# EAGLE board M_3x4._v7 (EAGLE 9.6.2), part 1 of 2
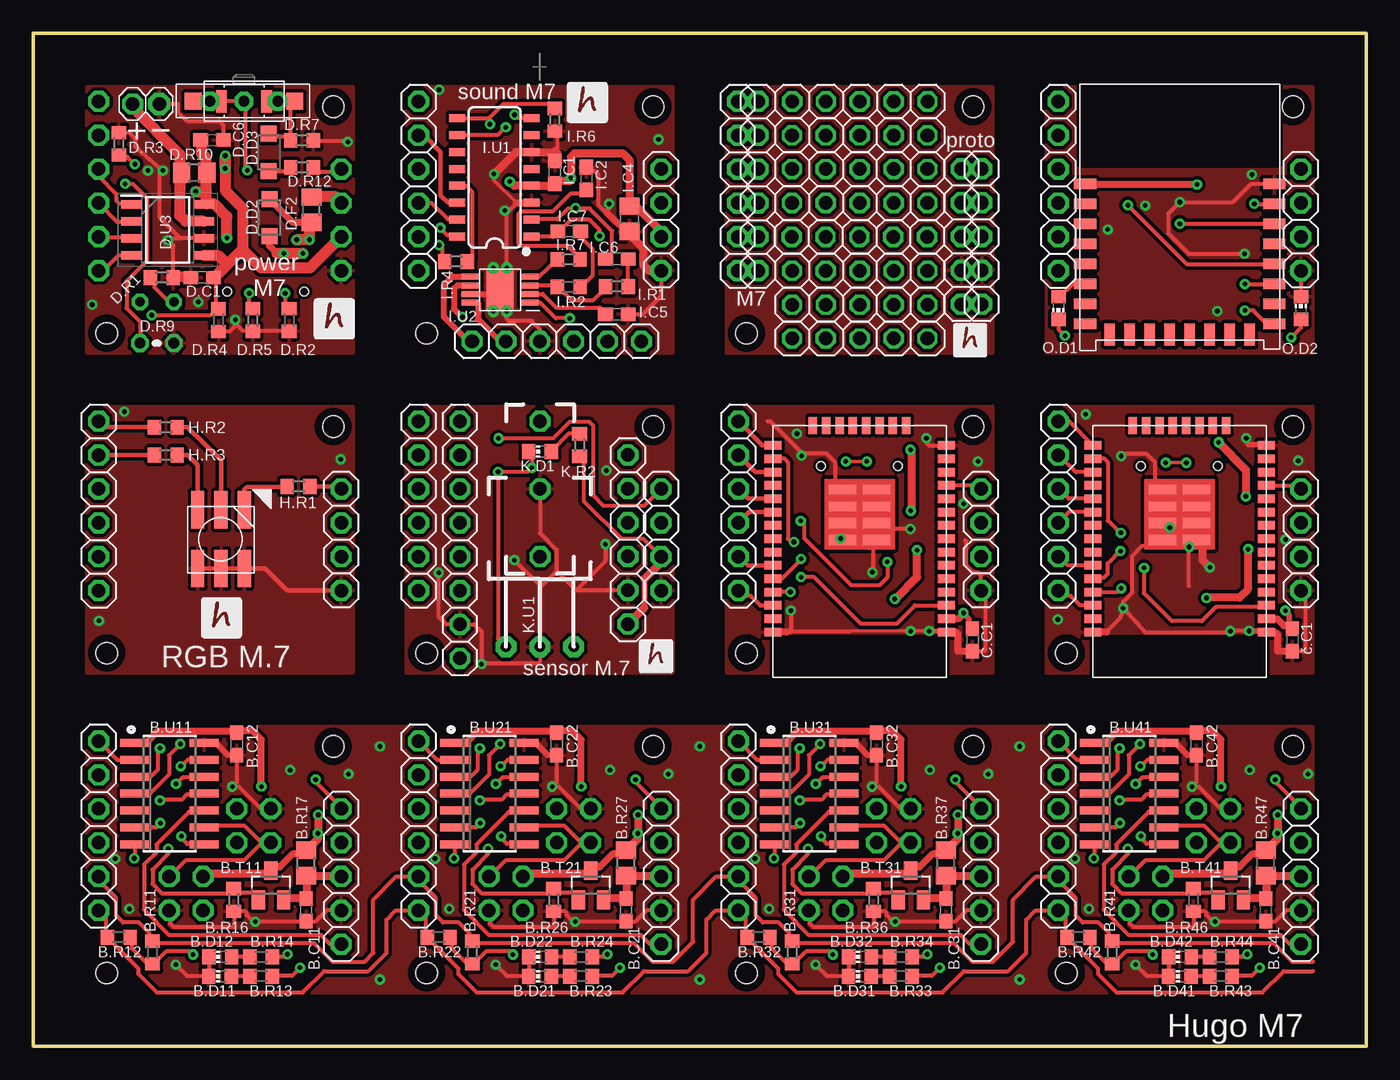
[diagram p0: board, top side]
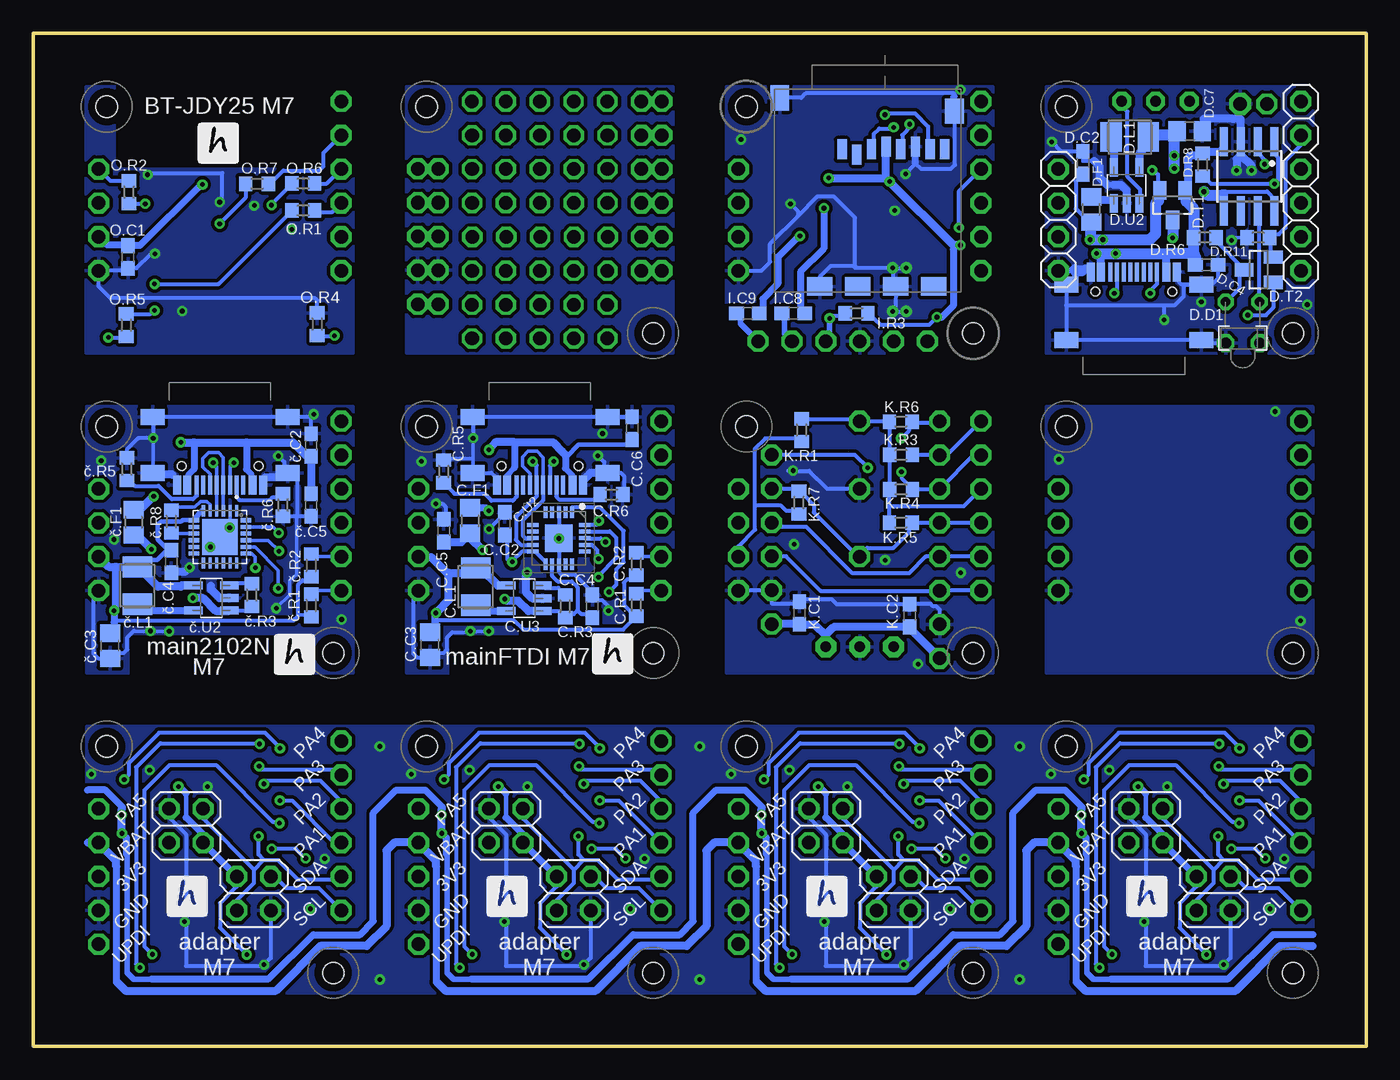
[diagram p1: board, bottom side, seen from below]

Size 100 x 76 mm. Coordinates in mm from the lower left corner, seen from the top.
Outline: 0,0 100,0 100,76 0,76 0,0
Copper layers (1*16): Top 0.035mm / dielectric 1.5mm / Bottom 0.035mm
Design rules "default *": minimum track width 10mil, minimum drill 0.35mm, track to track 6mil, track to pad 6mil, pad to pad 6mil, via to via 6mil, smd to smd 6mil, copper to edge 0mil, drill to drill 15mil, minimum pad ring 10mil, minimum via ring 8mil, stop-mask expansion 4mil, vias tented up to drill 14mil, thermal gap 10mil
Holes 1.6 mm at 5.5,29.5 22.5,46.5 29.5,53.5 46.5,70.5 70.5,70.5 53.5,53.5 94.5,70.5 5.5,5.5 22.5,22.5 29.5,5.5 46.5,22.5 53.5,5.5 70.5,22.5 77.5,5.5 94.5,22.5 46.5,46.5 29.5,29.5 53.5,29.5 70.5,46.5 77.5,29.5 94.5,46.5 5.5,53.5 22.5,70.5
tRestrict: area 21.5,45.5 to 23.5,47.5; area 4.5,28.5 to 6.5,30.5; area 45.5,69.5 to 47.5,71.5; area 28.5,52.5 to 30.5,54.5; area 69.5,69.5 to 71.5,71.5; area 52.5,52.5 to 54.5,54.5; area 93.5,69.5 to 95.5,71.5; area 21.5,21.5 to 23.5,23.5; area 4.5,4.5 to 6.5,6.5; area 45.5,21.5 to 47.5,23.5; area 28.5,4.5 to 30.5,6.5; area 69.5,21.5 to 71.5,23.5; 11 more areas
bRestrict: area 4.5,28.5 to 6.5,30.5; area 21.5,45.5 to 23.5,47.5; area 28.5,52.5 to 30.5,54.5; area 45.5,69.5 to 47.5,71.5; area 52.5,52.5 to 54.5,54.5; area 69.5,69.5 to 71.5,71.5; area 93.5,69.5 to 95.5,71.5; area 21.5,21.5 to 23.5,23.5; area 4.5,4.5 to 6.5,6.5; area 45.5,21.5 to 47.5,23.5; area 28.5,4.5 to 30.5,6.5; area 69.5,21.5 to 71.5,23.5; 11 more areas

## Footprints (pad centres in the part's own frame; a part is rotated, then mirrored left to right if it is on the bottom)
C0603 = smd 1.1 x 1: 1 -0.85,0; 2 0.85,0
CHIP-LED0603 = smd 1.1 x 1: A1 0,-0.85; C1 0,0.85
1X05 = drill 1.016 pad 1.575 octagon: 1 -5.08,0; 2 -2.54,0; 3 0,0; 4 2.54,0; 5 5.08,0
1X06 = drill 1.016 pad 1.575 octagon: 1 -6.35,0; 2 -3.81,0; 3 -1.27,0; 4 1.27,0; 5 3.81,0; 6 6.35,0
2X02 = drill 1.016 pad 1.575 octagon: 1 -1.27,-1.27; 2 -1.27,1.27; 3 1.27,-1.27; 4 1.27,1.27
R0603 = smd 1 x 1.1: 1 -0.85,0; 2 0.85,0
FUSE = smd 1.3 x 1.5: 1 -0.95,0; 2 0.95,0
SO23 = smd 1 x 1.4: D 0,1.1; G -0.95,-1.1; S 0.95,-1.1
SO14 = smd 0.6 x 2.2: 1 -3.81,-2.6; 2 -2.54,-2.6; 3 -1.27,-2.6; 4 0,-2.6; 5 1.27,-2.6; 6 2.54,-2.6; 7 3.81,-2.6; 8 3.81,2.6; 9 2.54,2.6; 10 1.27,2.6; 11 0,2.6; 12 -1.27,2.6; 13 -2.54,2.6; 14 -3.81,2.6
C0805 = smd 1.3 x 1.5: 1 -0.95,0; 2 0.95,0
R0805 = smd 1.3 x 1.5: 1 -0.95,0; 2 0.95,0
L3230M = smd 1.6 x 2.2: 1 -1.4,0; 2 1.4,0
TTGO-MICRO-32 = smd 1.27 x 0.635: 3V3 -6.5,5; EN -6.5,4; GND1 -6.5,6; GND2 -6.5,-8; GND3 6.5,6; IO0 6.5,-7; IO2 6.5,-8; IO4 6.5,-6; IO5 6.5,-3; IO12 -6.5,-7; IO14 -6.5,-6; IO16 6.5,-5; IO17 6.5,-4; IO18 6.5,-2; IO19 6.5,-1; IO21 6.5,1; IO22 6.5,4; IO23 6.5,5; IO25 -6.5,-3; IO26 -6.5,-4; IO27 -6.5,-5; IO32 -6.5,-1; IO33 -6.5,-2; IO34 -6.5,1; IO35 -6.5,0; NC 6.5,0; RXD0 6.5,2; TXD0 6.5,3; VN -6.5,2; VP -6.5,3 | smd 0.635 x 1.27: CLK 0.5,-9.5; CMD -0.5,-9.5; IO13 -3.5,-9.5; IO15 3.5,-9.5; SD0 1.5,-9.5; SD1 2.5,-9.5; SD2 -2.5,-9.5; SD3 -1.5,-9.5 | smd 2.032 x 0.762: GND4 -1.27,-0.889; GND5 1.27,-0.889; GND6 -1.27,-2.159; GND7 1.27,-2.159; GND8 -1.27,-3.429; GND9 -1.27,-4.699; GND10 1.27,-3.429; GND11 1.27,-4.699
QFN50P400X400X80-21N = smd 0.85 x 0.3: 1 -1.95,1; 2 -1.95,0.5; 3 -1.95,0; 4 -1.95,-0.5; 5 -1.95,-1; 11 1.95,-1; 12 1.95,-0.5; 13 1.95,0; 14 1.95,0.5; 15 1.95,1 | smd 0.3 x 0.85: 6 -1,-1.95; 7 -0.5,-1.95; 8 0,-1.95; 9 0.5,-1.95; 10 1,-1.95; 16 1,1.95; 17 0.5,1.95; 18 0,1.95; 19 -0.5,1.95; 20 -1,1.95 | smd 2.05 x 2.05: 21 0,0
SOT32-5 = smd 0.6 x 1.4: BP 0.95,1.35; GND 0,-1.35; SHDN 0.95,-1.35; VIN -0.95,-1.35; VOUT -0.95,1.35
LED_1.8 = drill 0.7 octagon: 1 -1.27,-0.4; 2 1.27,-0.4
SHOTKY_2.8 = smd 1.2 x 1.2: A -1.4,0; K 1.4,0
1X04 = drill 1.016 pad 1.575 octagon: 1 -3.81,0; 2 -1.27,0; 3 1.27,0; 4 3.81,0
1X02-2 = drill 1.016 pad 1.676 octagon: 1 -1,0 | drill 1.016 pad 1.575 octagon: 2 1,0
SWITCH = drill 0.8 pad 1.422 octagon: P$1 2.54,0; P$2 0,0; P$3 -2.54,0 | smd 0.8 x 1.7: P$4 -1.7,0; P$5 1.7,0 | smd 1.27 x 1.27: P$6 -3.81,0; P$7 3.81,0
THERM = drill 0.813 octagon: 1 -1.27,0; 2 1.27,0
SOIC127P600X175-8N = smd 1.528 x 0.65: 1 -2.711,1.905; 2 -2.711,0.635; 3 -2.711,-0.635; 4 -2.711,-1.905; 5 2.711,-1.905; 6 2.711,-0.635; 7 2.711,0.635; 8 2.711,1.905
RGB_WW-FCE50TC-Q1 = smd 1 x 2.8: 1 -1.778,-2.286; 2 -0.028,-2.286; 3 1.722,-2.286; 4 -1.778,2.114; 5 -0.028,2.114; 6 1.722,2.114
SO16 = smd 0.6 x 1.2: 1 -4.445,-2.8; 2 -3.175,-2.8; 3 -1.905,-2.8; 4 -0.635,-2.8; 5 0.635,-2.8; 6 1.905,-2.8; 7 3.175,-2.8; 8 4.445,-2.8; 9 4.445,2.8; 10 3.175,2.8; 11 1.905,2.8; 12 0.635,2.8; 13 -0.635,2.8; 14 -1.905,2.8; 15 -3.175,2.8; 16 -4.445,2.8
MSOP-POWERPAD-8 = smd 1.4 x 0.45: 1 -2.184,0.959; 2 -2.184,0.309; 3 -2.184,-0.341; 4 -2.184,-0.991; 5 2.216,-0.991; 6 2.216,-0.341; 7 2.216,0.309; 8 2.216,0.959 | smd 2 x 3: 9 0.016,-0.016 | drill 0.35: P$10 -0.484,-1.651; P$11 0.516,-1.651; P$12 0.516,1.619; P$13 -0.484,1.619
1X08 = drill 1.016 pad 1.575 octagon: 1 -8.89,0; 2 -6.35,0; 3 -3.81,0; 4 -1.27,0; 5 1.27,0; 6 3.81,0; 7 6.35,0; 8 8.89,0
IR_RECEIVER = drill 0.8 pad 1.575 octagon: GND 0,0; OUT -2.54,0; VCC 2.54,0
USB-C = smd 0.6 x 1.45: A1B12 -3.235,3.825; A4B9 -2.46,3.825; B1A12 3.215,3.825; B4A9 2.44,3.825 | smd 0.3 x 1.45: A5 -1.26,3.825; A6 -0.26,3.825; A7 0.24,3.825; A8 1.24,3.825; B5 1.74,3.825; B6 0.74,3.825; B7 -0.76,3.825; B8 -1.76,3.825 | smd 1.8 x 1.2: SH1 -5.08,2.91; SH2 -5.08,-1.27; SH3 5.06,-1.27; SH4 5.06,2.91 | hole 0.65: 2.88,2.38; -2.9,2.38
SOP8 = smd 0.6 x 2.2: 1 -1.905,-2.6; 2 -0.635,-2.6; 3 0.635,-2.6; 4 1.905,-2.6; 5 1.905,2.6; 6 0.635,2.6; 7 -0.635,2.6; 8 -1.905,2.6
MOCRO_SD = smd 0.7 x 1.5: 1 8.92,-10.7; 2 7.82,-10.3; 3 6.72,-10.7; 4 5.62,-10.9; 5 4.52,-10.7; 6 3.42,-10.9; 7 2.32,-10.7; 8 1.22,-10.7 | smd 1.9 x 1.4: G1 4.9,-0.4; G2 10.6,-0.4; S1 2.05,-0.4; S2 7.75,-0.4 | smd 1.4 x 1.9: G3 0.5,-13.55; G4 13.6,-14.55
1X5_AUTO = drill 1.016 octagon: 1 -5.08,0; 2 -2.54,0; 3 0,0; 4 2.54,0; 5 5.08,0
JDY-25 = smd 1.676 x 0.813: ALED 14.6,2; GND 14.6,12.5; INPUT1 0.4,2; INPUT3 0.4,3.5; INPUT5 0.4,6.5; NC1 0.4,11; NC2 0.4,9.5; NC3 0.4,8; OUT3 14.6,3.5; OUT4 14.6,8; PWRC 14.6,9.5; RST 14.6,11; RXD 14.6,6.5; STAT 0.4,5; TXD 14.6,5; VCC 0.4,12.5 | smd 0.813 x 1.676: INPUT2 3.75,1.2; INPUT4 6.75,1.2; NC4 2.25,1.2; NC5 9.75,1.2; NC6 11.25,1.2; OUT1 12.75,1.2; OUT2 5.25,1.2; OUT5 8.25,1.2
BUTTON-SWITCH = drill 1.016 pad 1.575 octagon: P$1 0,0; P$2 5.08,0; P$3 10.16,0
QFN50P400X400X80-25N = smd 0.81 x 0.26: 1 -1.955,1.25; 2 -1.955,0.75; 3 -1.955,0.25; 4 -1.955,-0.25; 5 -1.955,-0.75; 6 -1.955,-1.25; 13 1.955,-1.25; 14 1.955,-0.75; 15 1.955,-0.25; 16 1.955,0.25; 17 1.955,0.75; 18 1.955,1.25 | smd 0.26 x 0.81: 7 -1.25,-1.955; 8 -0.75,-1.955; 9 -0.25,-1.955; 10 0.25,-1.955; 11 0.75,-1.955; 12 1.25,-1.955; 19 1.25,1.955; 20 0.75,1.955; 21 0.25,1.955; 22 -0.25,1.955; 23 -0.75,1.955; 24 -1.25,1.955 | smd 2.68 x 2.68: 25 0,0

## Placement (x,y rotation side)
B.C11  100n  [C0603]  20.47,10.23 270 top
B.C12  100n  [C0603]  15.26,22.68 270 top
B.C21  100n  [C0603]  44.47,10.23 270 top
B.C22  100n  [C0603]  39.26,22.68 270 top
B.C31  100n  [C0603]  68.47,10.23 270 top
B.C32  100n  [C0603]  63.26,22.68 270 top
B.C41  100n  [C0603]  92.47,10.23 270 top
B.C42  100n  [C0603]  87.26,22.68 270 top
B.D11  [CHIP-LED0603]  14,5.25 90 top
B.D12  [CHIP-LED0603]  14.03,6.7 90 top
B.D21  [CHIP-LED0603]  38,5.25 90 top
B.D22  [CHIP-LED0603]  38.03,6.7 90 top
B.D31  [CHIP-LED0603]  62,5.25 90 top
B.D32  [CHIP-LED0603]  62.03,6.7 90 top
B.D41  [CHIP-LED0603]  86,5.25 90 top
B.D42  [CHIP-LED0603]  86.03,6.7 90 top
B.J1  [1X05]  23.1,12.73 270 top
B.J2  [1X06]  4.9,16.54 90 top
B.J3  [2X02]  11.46,11.46 270 bottom
B.J4  [2X02]  16.54,16.54 270 bottom
B.J5  [1X06]  28.9,16.54 90 top
B.J6  [2X02]  35.46,11.46 270 bottom
B.J7  [2X02]  40.54,16.54 270 bottom
B.J8  [1X05]  47.1,12.73 270 top
B.J9  [1X06]  52.9,16.54 90 top
B.J10  [2X02]  59.46,11.46 270 bottom
B.J11  [2X02]  64.54,16.54 270 bottom
B.J12  [1X05]  71.1,12.73 270 top
B.J13  [1X06]  76.9,16.54 90 top
B.J14  [2X02]  83.46,11.46 270 bottom
B.J15  [2X02]  88.54,16.54 270 bottom
B.J16  [1X05]  95.1,12.73 270 top
B.R11  2k2  [R0603]  8.94,7.03 270 top
B.R12  2k2  [R0603]  6.42,8.17 0 top
B.R13  1k  [R0603]  17.09,5.25 0 top
B.R14  1k  [R0603]  17.09,6.7 0 top
B.R16  100k  [R0603]  15.03,10.97 270 top
B.R17  alt fuse or 0R  [FUSE]  20.47,13.75 90 top
B.R21  2k2  [R0603]  32.94,7.03 270 top
B.R22  2k2  [R0603]  30.42,8.17 0 top
B.R23  1k  [R0603]  41.09,5.25 0 top
B.R24  1k  [R0603]  41.09,6.7 0 top
B.R26  100k  [R0603]  39.03,10.97 270 top
B.R27  alt fuse or 0R  [FUSE]  44.47,13.75 90 top
B.R31  2k2  [R0603]  56.94,7.03 270 top
B.R32  2k2  [R0603]  54.42,8.17 0 top
B.R33  1k  [R0603]  65.09,5.25 0 top
B.R34  1k  [R0603]  65.09,6.7 0 top
B.R36  100k  [R0603]  63.03,10.97 270 top
B.R37  alt fuse or 0R  [FUSE]  68.47,13.75 90 top
B.R41  2k2  [R0603]  80.94,7.03 270 top
B.R42  2k2  [R0603]  78.42,8.17 0 top
B.R43  1k  [R0603]  89.09,5.25 0 top
B.R44  1k  [R0603]  89.09,6.7 0 top
B.R46  100k  [R0603]  87.03,10.97 270 top
B.R47  alt fuse or 0R  [FUSE]  92.47,13.75 90 top
B.T11  NX3008  [SO23]  17.83,12.09 0 top
B.T21  NX3008  [SO23]  41.83,12.09 0 top
B.T31  NX3008  [SO23]  65.83,12.09 0 top
B.T41  NX3008  [SO23]  89.83,12.09 0 top
B.U11  AT414  [SO14]  10.22,18.95 270 top
B.U21  AT414  [SO14]  34.22,18.95 270 top
B.U31  AT414  [SO14]  58.22,18.95 270 top
B.U41  AT414  [SO14]  82.22,18.95 270 top
C.C1  100n  [C0603]  70.46,30.48 270 top
C.C2  100n  [C0603]  64.63,39.21 90 bottom
C.C3  22u  [C0805]  70.25,30.12 270 bottom
C.C4  100n  [C0603]  58.05,33.01 90 bottom
C.C5  4u7  [C0603]  69.2,38.68 270 bottom
C.C6  10nF  [C0603]  55.08,46.37 270 bottom
C.F1  0.5A  [R0805]  67.22,39.44 270 bottom
C.J1  [1X06]  76.9,40.54 90 top
C.J2  [1X06]  52.9,40.54 90 top
C.L1  4u7  [L3230M]  66.81,34.49 90 bottom
C.R1  2k2  [R0603]  54.75,33.11 270 bottom
C.R2  2k2  [R0603]  54.75,36.18 270 bottom
C.R3  100k  [R0603]  60.09,33.01 270 bottom
C.R5  5K1  [R0603]  69.21,43.13 270 bottom
C.R6  5k1  [R0603]  56.63,41.39 180 bottom
C.U1  TTGO-MICRO-32  [TTGO-MICRO-32]  61.99,37.08 180 top
C.U2  FT231XQ-R  [QFN50P400X400X80-21N]  60.57,38.12 270 bottom
C.U3  MCP1603T-330I  [SOT32-5]  63.16,33.61 90 bottom
C.U4  TTGO-MICRO-32  [TTGO-MICRO-32]  85.99,37.08 180 top
D.C1  100n  [C0603]  12.67,57.67 0 top
D.C2  4u7  [C0603]  21.25,66.28 270 bottom
D.C4  4u7  [C0603]  11.97,58.63 180 bottom
D.C6  4u7  [C0603]  13.41,67.99 180 top
D.C7  10u  [C0805]  13.24,68.65 180 bottom
D.D1  LED_1.8  [LED_1.8]  9.27,55.45 180 bottom
D.D2  SHOTKY_2.8  [SHOTKY_2.8]  17.72,62.17 90 top
D.D3  SHOTKY_2.8  [SHOTKY_2.8]  17.67,67.07 90 top
D.F1  0.5A  [R0805]  20.63,62.79 90 bottom
D.F2  1.1A  [R0805]  20.86,62.76 90 top
D.J2  [1X06]  4.9,64.54 90 bottom
D.J3  [1X04]  23.1,62 270 bottom
D.L1  2u2  [L3230M]  17.75,68.21 0 bottom
D.LIPOL  [1X02-2]  8.45,70.7 180 top
D.ON/OFF/RESET  SWITCH  [SWITCH]  15.8,70.9 0 top
D.R1  5k1  [R0603]  9.65,57.67 180 top
D.R2  5k1  [R0603]  19.2,54.5 270 top
D.R3  I=1800/R (10k for 0.2A, 3k3 for 0.55A, 3k9 for 0.46A)  [R0603]  6.41,67.7 270 top
D.R4  390k  [R0603]  13.89,54.47 270 top
D.R5  5k1  [R0603]  16.46,54.5 270 top
D.R6  3k3  [R0603]  12.11,60.67 180 bottom
D.R7  390k  [R0603]  20.16,67.96 0 top
D.R8  10k?  [R0603]  12.26,66.13 90 bottom
D.R9  TERM_10K  [THERM]  9.27,52.75 180 top
D.R10  0.1  [R0805]  12.08,65.53 180 top
D.R11  390k  [R0603]  8.1,60.67 180 bottom
D.R12  100k  [R0603]  20.16,65.93 180 top
D.T1  FDV304  [SO23]  14.53,63.11 180 bottom
D.T2  NX3008  [SO23]  8.07,58.26 90 bottom
D.U2  LM3671_3.3  [SOT32-5]  17.97,64.6 0 bottom
D.U3  INA219AIDR  [SOIC127P600X175-8N]  10.08,61.25 0 top
G.J1  [1X06]  76.9,64.54 90 top
G.J2  [1X04]  95.1,62 270 top
H.D1  RGB_WW-FCE50TC-Q1  [RGB_WW-FCE50TC-Q1]  14.05,37.95 180 top
H.J2  [1X06]  4.9,40.54 90 top
H.J4  [1X06]  39.27,52.9 180 top
H.R1  82  [R0603]  19.9,42 180 top
H.R2  82  [R0603]  9.94,46.45 0 top
H.R3  82  [R0603]  9.94,44.36 0 top
I.C1  100n  [C0603]  39.13,65.56 90 top
I.C2  100n  [C0603]  41.5,65.11 270 top
I.C4  10u (22u)  [C0805]  44.73,62.08 90 top
I.C5  220n  [C0603]  43.78,54.92 180 top
I.C6  100n  [C0603]  43.78,59.06 0 top
I.C7  100n  [C0603]  40.2,61.15 0 top
I.C8  100n  [C0603]  42.98,55 180 bottom
I.C9  100n  [C0603]  46.4,55 180 bottom
I.J1  [1X04]  47.1,38 270 top
I.J2  [1X06]  28.9,64.54 90 top
I.J3  [1X04]  47.1,62 270 top
I.R1  10k  [R0603]  43.78,57 180 top
I.R2  10k  [R0603]  40.17,56.97 180 top
I.R3  10k  [R0603]  38.23,55 0 bottom
I.R4  10k  [R0603]  31.71,58.87 0 top
I.R6  1k5  [R0603]  39.13,69.5 90 top
I.R7  10k  [R0603]  40.17,59.05 180 top
I.U1  WT2003S  [SO16]  34.6,65.19 90 top
I.U2  TPA6211  [MSOP-POWERPAD-8]  35.03,56.74 180 top
JP1  [1X04]  71.1,38 270 top
JP2  [1X04]  95.1,38 270 top
JP3  [1X04]  23.1,38 270 top
JP4  [1X06]  52.85,64.54 90 top
JP5  [1X06]  54.37,64.54 90 top
JP6  [1X05]  69.63,60.76 270 top
JP7  [1X06]  28.9,40.54 90 top
JP8  [1X08]  32,38 90 top
JP9  [1X06]  44.61,38.02 90 top
JP11  [1X05]  71.15,60.76 270 top
K.C1  [C0603]  42.51,32.5 90 bottom
K.C2  [C0603]  34.26,32.3 90 bottom
K.D1  [CHIP-LED0603]  38,44.62 90 top
K.R1  100K  [R0603]  42.36,46.22 90 bottom
K.R2  180R  [R0603]  40.98,45.1 90 top
K.R3  0R  [R0603]  34.9,44.37 0 bottom
K.R4  0R  [R0603]  34.9,41.77 0 bottom
K.R5  0R  [R0603]  34.92,39.29 0 bottom
K.R6  0R  [R0603]  34.92,46.85 0 bottom
K.R7  100K  [R0603]  42.56,40.78 90 bottom
K.U1  VS1838B  [IR_RECEIVER]  38,29.96 0 top
O.C1  100n  [C0603]  92.9,59.22 90 bottom
O.D1  [CHIP-LED0603]  76.92,55.4 180 top
O.D2  [CHIP-LED0603]  95.1,55.4 0 top
O.R1  2k2  [R0603]  79.75,64.73 0 bottom
O.R2  2k2  [R0603]  92.82,64.07 270 bottom
O.R4  2k2  [R0603]  78.7,54.17 270 bottom
O.R5  2k2  [R0603]  93.03,54.09 90 bottom
O.R6  2k2  [R0603]  79.75,62.7 0 bottom
O.R7  2k2  [R0603]  83.22,64.71 0 bottom
U$1  USB-C  [USB-C]  62,45.93 180 bottom
U$2  USB-C  [USB-C]  86,45.93 180 bottom
U$3  USB-C  [USB-C]  17.43,54.25 0 bottom
U$4  CN3083  [SOP8]  8.78,65.27 180 bottom
U$5  MICRO_SD  [MOCRO_SD]  30.4,56.6 180 bottom
U$6  PINHD-1X5_AUTO  [1X5_AUTO]  62.01,70.89 0 top
U$7  PINHD-1X5_AUTO  [1X5_AUTO]  62,68.35 0 top
U$8  PINHD-1X5_AUTO  [1X5_AUTO]  62,65.81 0 top
U$9  PINHD-1X5_AUTO  [1X5_AUTO]  62,63.27 0 top
U$10  PINHD-1X5_AUTO  [1X5_AUTO]  61.97,60.73 0 top
U$11  PINHD-1X5_AUTO  [1X5_AUTO]  62,58.19 0 top
U$12  PINHD-1X5_AUTO  [1X5_AUTO]  62,55.64 0 top
U$13  PINHD-1X5_AUTO  [1X5_AUTO]  62,53.1 0 top
U$14  JDY-25  [JDY-25]  78.5,52.2 0 top
U$15  BUTTON-SWITCH  [BUTTON-SWITCH]  38.02,36.73 90 top
č.C1  100n  [C0603]  94.46,30.48 270 top
č.C2  100n  [C0603]  79.15,45.1 90 bottom
č.C3  22u  [C0805]  94.25,30.05 270 bottom
č.C4  100n  [C0603]  89.65,36.36 270 bottom
č.C5  4u7  [C0603]  79.15,40.61 90 bottom
č.F1  0.5A  [R0805]  92.47,39.31 270 bottom
č.L1  4u7  [L3230M]  92.18,34.56 90 bottom
č.R1  2k2  [R0603]  79.15,33.06 270 bottom
č.R2  2k2  [R0603]  79.15,36.08 270 bottom
č.R3  100k  [R0603]  83.61,33.85 270 bottom
č.R5  5K1  [R0603]  92.99,43.3 270 bottom
č.R6  5k1  [R0603]  81.27,40.61 90 bottom
č.R8  100k  [R0603]  89.64,39.36 90 bottom
č.U1  CP2102N  [QFN50P400X400X80-25N]  85.99,38.21 270 bottom
č.U2  MCP1603T-330I  [SOT32-5]  86.65,33.63 90 bottom

## Library data of the parts
B.C11 B.C12 B.C21 B.C22 B.C31 B.C32 B.C41 B.C42 C.C1-C.C6 D.C1 D.C2 D.C4 D.C6 D.C7 I.C1 I.C2 I.C4-I.C9 K.C1 K.C2 O.C1 č.C1-č.C5 = rcl; SPICEPREFIX: C
B.D11 B.D12 B.D21 B.D22 B.D31 B.D32 B.D41 B.D42 K.D1 O.D1 O.D2 = led
B.J1-B.J16 C.J1 C.J2 D.J2 D.J3 D.LIPOL G.J1 G.J2 H.J2 H.J4 I.J1-I.J3 JP1-JP9 JP11 U$6-U$13 = pinhead2
B.R11-B.R14 B.R16 B.R21-B.R24 B.R26 B.R31-B.R34 B.R36 B.R41-B.R44 B.R46 C.F1 C.R1-C.R3 C.R5 C.R6 D.F1 D.F2 D.R1-D.R8 D.R10-D.R12 I.R1-I.R4 I.R6 I.R7 K.R1-K.R7 O.R1 O.R2 O.R4-O.R7 č.F1 č.R1-č.R3 č.R5 č.R6 č.R8 = rcl; SPICEPREFIX: R
B.R17 B.R27 B.R37 B.R47 B.T11 B.T21 B.T31 B.T41 C.U1 C.U4 D.D1-D.D3 D.ON/OFF/RESET D.R9 D.T1 D.T2 H.D1 I.U2 K.U1 U$1-U$5 U$14 U$15 = hugo
B.U11 B.U21 B.U31 B.U41 = atmel
C.L1 D.L1 č.L1 = rcl; SPICEPREFIX: L
C.U2 = FT231XQ-R; DESCRIPTION: FTDI Chip FT231XQ-R, USB Transceiver; HEIGHT: 0.8mm; MANUFACTURER_NAME: FTDI Chip; MANUFACTURER_PART_NUMBER: FT231XQ-R
C.U3 D.U2 č.U2 = !stavebnice03
D.U3 = SamacSys_Parts; DESCRIPTION: 26-V, Bidirectional, Zero-Drift, High-Side, I2C Out Current/Power Monitor; HEIGHT: 1.75mm; MANUFACTURER_NAME: Texas Instruments; MANUFACTURER_PART_NUMBER: INA219AIDR; MOUSER_PART_NUMBER: 595-INA219AIDR; MOUSER_PRICE-STOCK: https://www.mouser.co.uk/ProductDetail/Texas-Instruments/INA219AIDR?qs=XGzIaZb%2FFYIE5YcOHTnKDA%3D%3D
H.R1-H.R3 = resistor
I.U1 = WT2003S
č.U1 = CP2104; AVAILABILITY: Unavailable; DESCRIPTION: USB Bridge, USB to UART USB 2.0 UART Interface 24-QFN (4x4); MF: Silicon Labs; MP: CP2104; PACKAGE: QFN-24 Silicon Labs; PRICE: None

## Nets
GND: B.C11.2 B.C12.2 B.C21.2 B.C22.2 B.C31.2 B.C32.2 B.C41.2 B.C42.2 B.D11.C1 B.D12.C1 B.D21.C1 B.D22.C1 B.D31.C1 B.D32.C1 B.D41.C1 B.D42.C1 B.J1.4 B.J3.4 B.J4.1 B.J6.4 B.J7.1 B.J8.4 B.J10.4 B.J11.1 B.J12.4 B.J14.4 B.J15.1 B.J16.4 B.R16.2 B.R26.2 B.R36.2 B.R46.2 B.U11.14 B.U21.14 B.U31.14 B.U41.14
GND1: C.C1.2 C.C2.2 C.C3.2 C.C4.2 C.C5.1 C.C6.1 C.R5.1 C.R6.1 C.U1.GND1 C.U1.GND2 C.U1.GND3 C.U1.GND4 C.U1.GND5 C.U1.GND6 C.U1.GND7 C.U1.GND8 C.U1.GND9 C.U1.GND10 C.U1.GND11 C.U2.3 C.U2.13 C.U2.21 C.U3.GND JP1.4 U$1.A1B12 U$1.B1A12 U$1.SH1 U$1.SH2 U$1.SH3 U$1.SH4
GND2: C.U4.GND1 C.U4.GND2 C.U4.GND3 C.U4.GND4 C.U4.GND5 C.U4.GND6 C.U4.GND7 C.U4.GND8 C.U4.GND9 C.U4.GND10 C.U4.GND11 JP2.4 U$2.A1B12 U$2.B1A12 U$2.SH1 U$2.SH2 U$2.SH3 U$2.SH4 č.C1.2 č.C2.2 č.C3.2 č.C4.2 č.C5.1 č.R5.1 č.R6.1 č.U1.2 č.U1.25 č.U2.GND
GND3: D.C1.1 D.C2.1 D.C4.1 D.C6.1 D.C7.1 D.J3.4 D.LIPOL.1 D.R1.1 D.R2.2 D.R3.1 D.R4.2 D.R5.2 D.R7.2 D.R9.1 D.R11.2 D.U2.GND D.U3.6 U$3.A1B12 U$3.B1A12 U$3.SH1 U$3.SH2 U$3.SH3 U$3.SH4 U$4.3
GND4: H.D1.4 H.D1.5 H.D1.6 JP3.4
GND5: H.J4.4 I.C1.2 I.C2.1 I.C4.1 I.C5.1 I.J3.4 I.R6.1 I.U1.3 I.U1.6 I.U2.7 I.U2.9 I.U2.P$10 I.U2.P$11 I.U2.P$12 I.U2.P$13 U$5.6 U$5.G1 U$5.G2 U$5.G3 U$5.G4
GND6: JP6.4 JP11.4
GND7: G.J2.4 O.C1.1 O.D2.C1 O.R4.1 U$14.GND
GND8: I.J1.4 JP8.2 JP9.2 K.C1.2 K.C2.2 K.U1.GND U$15.P$2
IN+: D.LIPOL.2 D.R10.2 D.U3.7
IN-: D.C6.2 D.R10.1 D.T1.D D.U3.8 U$4.5 U$4.8
N$1: B.C21.1 B.J8.3 B.R27.1 B.T21.S
N$2: B.D22.A1 B.R24.1
N$3: B.D12.A1 B.R14.1
N$4: B.C11.1 B.J1.3 B.R17.1 B.T11.S
N$5: B.R13.2 B.U11.4
N$6: B.R23.2 B.U21.4
N$7: B.C31.1 B.J12.3 B.R37.1 B.T31.S
N$8: B.D32.A1 B.R34.1
N$9: B.R33.2 B.U31.4
N$10: B.C41.1 B.J16.3 B.R47.1 B.T41.S
N$11: B.D42.A1 B.R44.1
N$12: B.R43.2 B.U41.4
N$13: C.U2.9 U$1.A7 U$1.B7
N$14: C.U2.8 U$1.A6 U$1.B6
N$15: C.R6.2 U$1.A5
N$16: C.R5.2 U$1.B5
N$17: C.L1.1 C.U3.VOUT
N$18: C.R3.1 C.U3.SHDN
N$19: C.C2.1 C.U2.10 C.U2.11 C.U2.20
N$20: C.C6.2 C.F1.1 U$1.A4B9 U$1.B4A9
N$21: U$2.A7 U$2.B7 č.U1.4
N$22: U$2.A6 U$2.B6 č.U1.3
N$24: U$2.A5 č.R6.2
N$25: U$2.B5 č.R5.2
N$27: č.R8.2 č.U1.5
N$28: č.L1.1 č.U2.VOUT
N$29: č.R3.1 č.U2.SHDN
N$30: C.J1.5 C.U4.IO4
N$31: C.J1.4 C.U4.IO17
N$32: C.J1.3 C.U4.IO5
N$33: C.J1.6 C.U4.IO2
N$34: C.U4.IO27 JP2.1
N$35: č.R8.1 č.U1.9
N$36: č.F1.2 č.R3.2 č.U2.VIN
N$37: D.L1.1 D.U2.VOUT
N$38: D.R5.1 U$3.B5
N$39: D.R2.1 U$3.A5
N$40: D.R3.2 U$4.2
N$41: D.D1.1 U$4.7
N$42: D.R8.1 D.R9.2 U$4.1
N$43: D.F1.2 D.U2.VIN
N$44: D.D3.K D.ON/OFF/RESET.P$1 D.ON/OFF/RESET.P$5 D.ON/OFF/RESET.P$7 D.R7.1 D.U2.SHDN
N$45: D.D3.A D.R12.2
N$46: H.D1.2 H.R2.2
N$47: H.D1.1 H.R1.2
N$48: H.D1.3 H.R3.2
N$49: H.R1.1 JP3.1
N$50: H.J2.6 H.R2.1
N$51: H.J2.5 H.R3.1
N$52: I.C6.1 I.C8.1 I.U1.2
N$53: I.C7.1 I.C9.1 I.U1.1
N$54: I.C5.2 I.U2.2
N$55: I.R1.2 I.R2.2 I.U2.3
N$56: I.C6.2 I.R1.1
N$57: I.C7.2 I.R2.1
N$58: I.C2.2 I.R7.1
N$59: I.R7.2 I.U2.4
N$60: I.R4.2 I.U1.13
N$61: I.J2.5 I.U1.14
N$62: JP4.5 JP5.5
N$63: JP4.4 JP5.4
N$64: JP4.3 JP5.3
N$65: JP4.2 JP5.2
N$66: JP4.1 JP5.1
N$67: JP6.5 JP11.5
N$68: JP6.2 JP11.2
N$69: JP6.1 JP11.1
N$70: JP6.3 JP11.3
N$71: JP4.6 JP5.6
N$72: G.J2.1 O.R2.1
N$73: O.R1.1 U$14.RXD
N$74: O.R6.1 U$14.TXD
N$75: G.J1.5 O.R7.2
N$76: O.R7.1 U$14.PWRC
N$77: O.D2.A1 O.R5.1
N$78: O.R5.2 U$14.ALED
N$79: O.D1.A1 U$14.STAT
N$80: O.D1.C1 O.R4.2
N$81: O.R2.2 U$14.RST
N$82: JP7.2 JP8.4 JP9.4
N$83: JP7.1 JP8.3 JP9.3
N$84: K.D1.A1 K.R2.2
N$85: JP7.6 JP8.7 K.R3.2
N$86: I.J1.1 JP8.8 K.R6.2
N$87: JP7.5 JP8.6 JP9.6 K.D1.C1 K.R4.2 K.U1.OUT
N$88: JP7.4 K.R1.2 K.R3.1 K.R4.1 K.R5.1 K.R6.1 U$15.P$3
N$89: JP7.3 JP8.5 JP9.5 K.R5.2 K.R7.2 U$15.P$1
PA1: B.J2.3 B.U11.11
PA2: B.J2.4 B.U11.12
PA3: B.J2.5 B.U11.13
PA3-1: D.J2.5 D.R11.1 D.T2.S
PA4: B.J2.6 B.U11.2
PA5: B.J1.1 B.U11.3
PA5-1: D.J3.1 D.R12.1
PA6: B.J5.5 B.U21.13
PA7: B.J5.4 B.U21.12
PA8: B.D21.A1 B.R23.1
PA9: B.J5.6 B.U21.2
PA10: B.J5.3 B.U21.11
PA11: B.J8.1 B.U21.3
PA12: B.J9.5 B.U31.13
PA13: B.J9.4 B.U31.12
PA14: B.D31.A1 B.R33.1
PA15: B.J9.6 B.U31.2
PA16: B.J9.3 B.U31.11
PA17: B.J12.1 B.U31.3
PA18: B.J13.5 B.U41.13
PA19: B.J13.4 B.U41.12
PA20: B.D41.A1 B.R43.1
PA21: B.J13.6 B.U41.2
PA22: B.J13.3 B.U41.11
PA23: B.J16.1 B.U41.3
PA24: C.J2.5 C.U1.IO4
PA25: C.J2.4 C.U1.IO17
PA26: C.J2.3 C.U1.IO5
PA27: C.J2.6 C.U1.IO2
PA28: C.U1.IO27 JP1.1
PA29: D.C4.2 D.D2.A D.R6.2 D.R8.2 D.T1.G U$3.A4B9 U$3.B4A9 U$4.4
PA30: D.J2.4 D.U3.1
PA31: D.J2.3 D.U3.2
PA32: D.D1.2 D.R1.2 D.R6.1 D.T2.D
PA51: B.D11.A1 B.R13.1
PB1: B.R26.1 B.T21.G B.U21.7
PB2: B.R16.1 B.T11.G B.U11.7
PB3: B.R14.2 B.U11.6
PB4: B.R24.2 B.U21.6
PB5: B.R36.1 B.T31.G B.U31.7
PB6: B.R34.2 B.U31.6
PB7: B.R46.1 B.T41.G B.U41.7
PB8: B.R44.2 B.U41.6
PROG: C.U1.IO0 C.U2.18
PROG1: C.U4.IO0 č.U1.23
RESET: C.U1.EN C.U2.19
RESET1: C.U4.EN č.U1.19
RX: C.U4.TXD0 č.U1.20
RX1: I.J2.3 I.U1.15
RX2: G.J1.3 O.R6.2
RX/TX: C.U1.TXD0 C.U2.1
SCL: B.J2.1 B.J3.2 B.J4.3 B.J5.1 B.J6.2 B.J7.3 B.J9.1 B.J10.2 B.J11.3 B.J13.1 B.J14.2 B.J15.3 B.R12.1 B.R22.1 B.R32.1 B.R42.1 B.U11.9 B.U21.9 B.U31.9 B.U41.9
SCL1: C.J2.1 C.R1.1 C.U1.IO22
SCL2: C.J1.1 C.U4.IO22 č.R1.1
SCL3: D.J2.1 D.U3.4
SDA: B.J2.2 B.J3.3 B.J4.2 B.J5.2 B.J6.3 B.J7.2 B.J9.2 B.J10.3 B.J11.2 B.J13.2 B.J14.3 B.J15.2 B.R11.1 B.R21.1 B.R31.1 B.R41.1 B.U11.8 B.U21.8 B.U31.8 B.U41.8
SDA1: C.J2.2 C.R2.1 C.U1.IO21
SDA2: C.J1.2 C.U4.IO21 č.R2.1
SDA3: D.J2.2 D.U3.3
SDCLK: I.R6.2 I.U1.9 U$5.5
SDCMD: I.U1.10 U$5.3
SDDAT: I.U1.8 U$5.7
SHTDOWN: H.J4.3 I.R3.1 I.U2.1
TX: C.U4.RXD0 č.U1.21
TX1: I.J2.4 I.U1.16
TX2: G.J1.4 O.R1.2
TX/RX: C.U1.RXD0 C.U2.17
UPDI: B.J1.5 B.U11.10
UPDI1: B.J8.5 B.U21.10
UPDI2: B.J12.5 B.U31.10
UPDI3: B.J16.5 B.U41.10
VBAT: B.J1.2 B.J8.2 B.J12.2 B.J16.2
VBATF: D.F2.2 D.J3.2
VCC: B.C12.1 B.C22.1 B.C32.1 B.C42.1 B.J3.1 B.J4.4 B.J6.1 B.J7.4 B.J10.1 B.J11.4 B.J14.1 B.J15.4 B.R11.2 B.R12.2 B.R17.2 B.R21.2 B.R22.2 B.R27.2 B.R31.2 B.R32.2 B.R37.2 B.R41.2 B.R42.2 B.R47.2 B.T11.D B.T21.D B.T31.D B.T41.D B.U11.1 B.U21.1 B.U31.1 B.U41.1
VCC1: C.C1.1 C.C3.1 C.L1.2 C.R1.2 C.R2.2 C.U1.3V3 C.U3.BP JP1.3
VCC2: C.U4.3V3 JP2.3 č.C1.1 č.C3.1 č.C4.1 č.L1.2 č.R1.2 č.R2.2 č.U1.6 č.U1.7 č.U2.BP
VCC3: D.C1.2 D.C7.2 D.J3.3 D.L1.2 D.R4.1 D.T2.G D.U2.BP D.U3.5
VCC4: I.C1.1 I.C4.2 I.J3.3 I.R3.2 I.R4.1 I.U1.4 I.U2.6 U$5.4
VCC5: G.J2.3 O.C1.2 U$14.VCC
VCC6: I.J1.3 JP8.1 JP9.1 K.C1.1 K.C2.1 K.R1.1 K.R2.1 K.R7.1 K.U1.VCC
VDD: JP3.3
VMOT: D.C2.2 D.D2.K D.F1.1 D.F2.1 D.ON/OFF/RESET.P$2 D.ON/OFF/RESET.P$3 D.ON/OFF/RESET.P$4 D.ON/OFF/RESET.P$6 D.T1.S
VO+: H.J4.6 I.U2.5
VO-: H.J4.5 I.U2.8
VOUTL: H.J4.1 I.C9.2
VOUTR: H.J4.2 I.C8.2
VUSB: C.C4.1 C.C5.2 C.F1.2 C.R3.2 C.U2.12 C.U3.VIN
VUSB1: U$2.A4B9 U$2.B4A9 č.C2.1 č.C5.2 č.F1.1